# Altium PCB PCB1.PcbDoc (part 3 of 3)
Units mm, origin at the board's own origin, x right, y up, seen from the top; angles counter-clockwise.
Board outline 297.31 x 194.82 mm, 2 copper layers (Top Layer, Bottom Layer); 61 components, 34 nets, 159 pads, 65 vias.
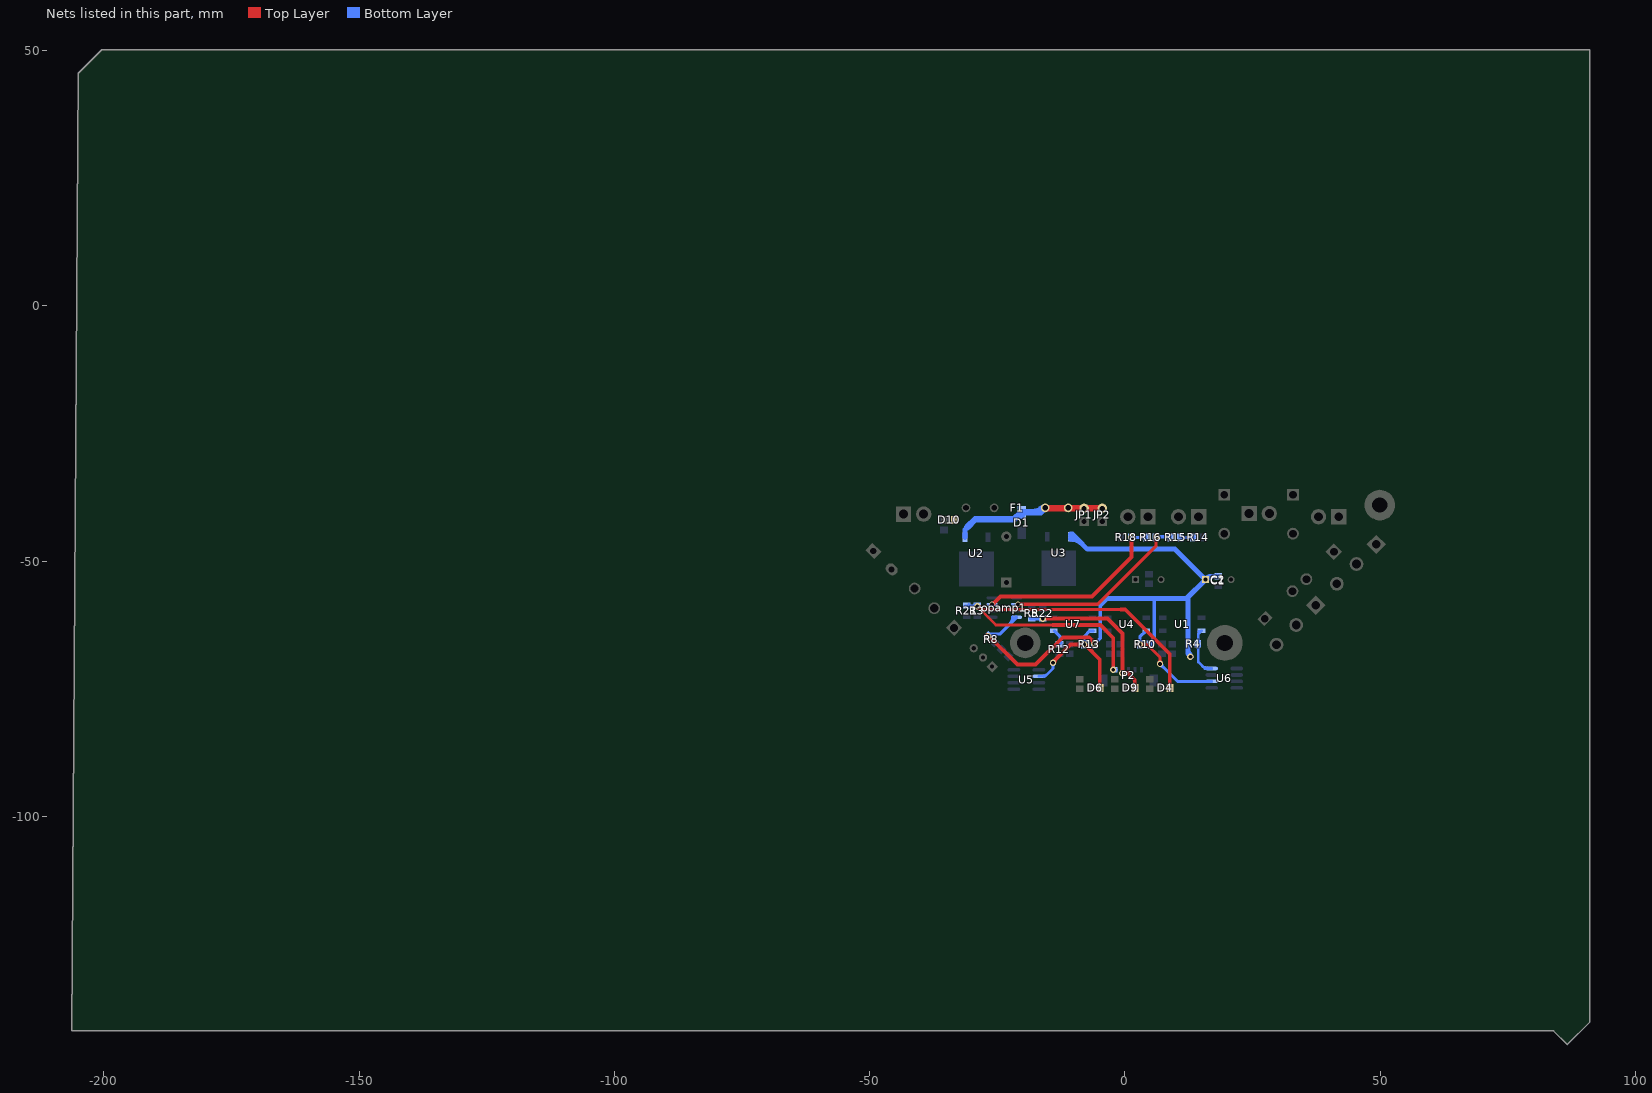
[diagram p3: the nets of this part, all layers, seen from the top]

## Via types
v1: diameter 1.27, hole 0.711, Top Layer to Bottom Layer, 63 vias
v2: diameter 1.016, hole 0.711, Top Layer to Bottom Layer, 2 vias

## Nets (pads, with @x,y where several pads share a name; then routed paths per layer and width w, separated by ;. In a path a pad name is that pad's centre, name@x,y a point inside that pad or via, vN(x,y) a via of type N, cw(c..) or ccw(c..) an arc to the next point about the centre after c; other vN are vias at no path point) (continued)
NetR12_1: R12.1 U7.1 | length 6.8
  Bottom Layer w0.635: U7.1@-13.843,-63.627 -12.7,-64.77 -12.7,-66.04 R12.1@-12.827,-66.167 ; R12.1@-12.962,-65.998 ccw(c-13.595,-65.365) -12.7,-65.365 ; R12.1@-12.962,-65.998 ccw(c-13.595,-65.365) -12.7,-65.365 ; R12.1@-12.962,-65.998 ccw(c-13.595,-65.365) -12.7,-65.365 ; -12.7,-65.495 ccw(c-11.989,-65.495) R12.1@-12.492,-65.998 ; -12.7,-65.495 ccw(c-11.989,-65.495) R12.1@-12.492,-65.998 ; -12.7,-65.495 ccw(c-11.989,-65.495) R12.1@-12.492,-65.998
NetR14_2: R14.2 R15.2 | length 10.2
  Bottom Layer w0.635: R15.2@10.856,-45.339 R14.2@13.401,-45.339 R14.2@13.462,-45.339 ; R15.2@11.091,-45.574 cw(c11.659,-46.142) 11.659,-45.339 ; R15.2@11.091,-45.574 cw(c11.659,-46.142) 11.659,-45.339 ; R15.2@11.091,-45.574 cw(c11.659,-46.142) 11.659,-45.339 ; R15.2@11.091,-45.104 ccw(c11.659,-44.536) 11.659,-45.339 ; R15.2@11.091,-45.104 ccw(c11.659,-44.536) 11.659,-45.339 ; R15.2@11.091,-45.104 ccw(c11.659,-44.536) 11.659,-45.339 ; 12.598,-45.339 cw(c12.598,-46.142) R14.2@13.166,-45.574 ; 12.598,-45.339 ccw(c12.598,-44.536) R14.2@13.166,-45.104 ; 12.598,-45.339 cw(c12.598,-46.142) R14.2@13.166,-45.574 ; 12.598,-45.339 ccw(c12.598,-44.536) R14.2@13.166,-45.104 ; 12.598,-45.339 cw(c12.598,-46.142) R14.2@13.166,-45.574 ; 12.598,-45.339 ccw(c12.598,-44.536) R14.2@13.166,-45.104
OPAMP-IN1: opamp1.3 R16.1 R18.2 | length 48
  Top Layer w0.75: v2(-26.035,-58.42) -26.035,-58.547 -24.384,-56.896 -6.477,-56.896 1.27,-49.149 v1(1.27,-45.339)
  Bottom Layer w0.635: R18.2@1.204,-45.339 v1(1.27,-45.339) R16.1@4.064,-45.339 ; R18.2@1.439,-45.574 cw(c2.007,-46.142) 2.007,-45.339 ; R18.2@1.439,-45.574 cw(c2.007,-46.142) 2.007,-45.339 ; R18.2@1.439,-45.574 cw(c2.007,-46.142) 2.007,-45.339 ; R18.2@1.439,-45.104 ccw(c2.007,-44.536) 2.007,-45.339 ; R18.2@1.439,-45.104 ccw(c2.007,-44.536) 2.007,-45.339 ; R18.2@1.439,-45.104 ccw(c2.007,-44.536) 2.007,-45.339 ; 2.037,-45.339 cw(c2.037,-44.572) 1.495,-45.114 ccw(c2.037,-44.572) 2.037,-45.339 ; 2.037,-45.339 ccw(c2.037,-46.106) 1.495,-45.564 cw(c2.037,-46.106) 2.037,-45.339 ; 3.327,-45.339 cw(c3.327,-46.142) R16.1@3.895,-45.574 ; 3.327,-45.339 ccw(c3.327,-44.536) R16.1@3.895,-45.104 ; 3.327,-45.339 cw(c3.327,-46.142) R16.1@3.895,-45.574 ; 3.327,-45.339 ccw(c3.327,-44.536) R16.1@3.895,-45.104 ; 3.327,-45.339 cw(c3.327,-46.142) R16.1@3.895,-45.574 ; 3.327,-45.339 ccw(c3.327,-44.536) R16.1@3.895,-45.104
OPAMP-IN2: opamp1.6 R15.1 R16.2 | length 49.2
  Top Layer w0.635: v2(-20.955,-58.42) -5.334,-58.42 6.096,-46.99 v1(6.096,-45.212) v1@6.096,-44.831 ; 6.096,-45.979 cw(c6.863,-45.979) 6.321,-45.437 ccw(c6.863,-45.979) 6.096,-45.979 ; 6.096,-45.979 ccw(c5.329,-45.979) 5.871,-45.437 cw(c5.329,-45.979) 6.096,-45.979
  Bottom Layer w0.635: R16.2@6.03,-45.339 6.157,-45.212 R15.1@8.89,-45.212 ; R16.2@6.265,-45.474 cw(c6.898,-46.107) 6.898,-45.212 ; R16.2@6.265,-45.474 cw(c6.898,-46.107) 6.898,-45.212 ; R16.2@6.265,-45.474 cw(c6.898,-46.107) 6.898,-45.212 ; R16.2@6.265,-45.004 ccw(c6.768,-44.501) 6.768,-45.212 ; R16.2@6.265,-45.004 ccw(c6.768,-44.501) 6.768,-45.212 ; R16.2@6.265,-45.004 ccw(c6.768,-44.501) 6.768,-45.212 ; 6.863,-45.212 cw(c6.863,-44.445) 6.321,-44.987 ccw(c6.863,-44.445) 6.863,-45.212 ; 6.863,-45.212 ccw(c6.863,-45.979) 6.321,-45.437 cw(c6.863,-45.979) 6.863,-45.212 ; 8.088,-45.212 cw(c8.088,-46.107) R15.1@8.721,-45.474 ; 8.088,-45.212 cw(c8.088,-46.107) R15.1@8.721,-45.474 ; 8.088,-45.212 cw(c8.088,-46.107) R15.1@8.721,-45.474 ; 8.218,-45.212 ccw(c8.218,-44.501) R15.1@8.721,-45.004 ; 8.218,-45.212 ccw(c8.218,-44.501) R15.1@8.721,-45.004 ; 8.218,-45.212 ccw(c8.218,-44.501) R15.1@8.721,-45.004
OPAMP-OUT1: D4.1 P2.1 R3.2 R21.1 | length 101.4
  Top Layer w0.508: v1(-28.956,-58.801) -25.276,-62.481 -15.624,-62.481 -15.621,-62.484 -14.097,-62.484 ; -28.321,-59.436 -0.762,-59.436 ; -28.306,-59.451 cw(c-27.655,-58.801) -28.575,-58.801 ccw(c-27.655,-58.801) -28.306,-59.451 ; -28.306,-59.451 ccw(c-28.956,-60.102) -28.956,-59.182 cw(c-28.956,-60.102) -28.306,-59.451
  Top Layer w0.75: -14.097,-62.484 -4.826,-62.484 -2.286,-65.024 v1(-2.286,-71.247) ; -0.762,-59.436 0.041,-59.436 8.763,-68.158 D4.1@8.763,-75.057 ; 8.763,-73.892 ccw(c9.635,-73.892) D4.1@9.018,-74.509
  Bottom Layer w0.508: R21.1@-31.242,-58.674 -31.176,-58.74 R3.2@-28.956,-58.74 ; R21.1@-30.608,-59.02 cw(c-29.932,-59.696) -29.932,-58.74 ; R21.1@-30.608,-59.02 cw(c-29.932,-59.696) -29.932,-58.74 ; R21.1@-30.608,-59.02 cw(c-29.932,-59.696) -29.932,-58.74 ; R21.1@-30.608,-58.46 ccw(c-29.932,-57.784) -29.932,-58.74 ; R21.1@-30.608,-58.46 ccw(c-29.932,-57.784) -29.932,-58.74 ; R21.1@-30.608,-58.46 ccw(c-29.932,-57.784) -29.932,-58.74 ; -30.012,-58.74 cw(c-30.012,-59.696) R3.2@-29.336,-59.02 ; -30.012,-58.74 ccw(c-30.012,-57.784) R3.2@-29.336,-58.46 ; -30.012,-58.74 cw(c-30.012,-59.696) R3.2@-29.336,-59.02 ; -30.012,-58.74 ccw(c-30.012,-57.784) R3.2@-29.336,-58.46 ; -30.012,-58.74 cw(c-30.012,-59.696) R3.2@-29.336,-59.02 ; -30.012,-58.74 ccw(c-30.012,-57.784) R3.2@-29.336,-58.46 ; -30.023,-58.74 cw(c-30.023,-59.868) -29.225,-59.07 ccw(c-30.023,-59.868) -30.023,-58.74 ; -29.729,-58.74 ccw(c-29.729,-58.028) -29.225,-58.532 cw(c-29.729,-58.028) -29.729,-58.74
  Bottom Layer w0.75: v1(-2.286,-71.247) P2.1@-1.778,-71.247
OPAMP-OUT2: D9.1 P2.2 R5.1 R22.1 | length 36
  Top Layer w0.75: v1(-16.129,-61.214) -3.429,-61.214 -0.508,-64.135 -0.508,-68.453 v1@-0.508,-71.374 ; v1(-0.508,-71.882) 0.508,-71.882 1.905,-73.279 D9.1@1.905,-74.93 ; 1.905,-73.892 ccw(c2.777,-73.892) D9.1@2.16,-74.509
  Bottom Layer w0.508: R5.1@-18.288,-61.087 R5.1@-18.227,-61.148
  Bottom Layer w0.75: R5.1@-18.415,-61.214 v1(-16.129,-61.214) ; R5.1@-17.994,-60.954 ccw(c-17.365,-60.325) -17.365,-61.214 ; R5.1@-17.994,-60.954 ccw(c-17.365,-60.325) -17.365,-61.214 ; R5.1@-17.994,-60.954 ccw(c-17.365,-60.325) -17.365,-61.214 ; -17.052,-61.214 ccw(c-17.052,-60.325) R22.1@-16.423,-60.954 ; -17.052,-61.214 ccw(c-17.052,-60.325) R22.1@-16.423,-60.954 ; -17.052,-61.214 ccw(c-17.052,-60.325) R22.1@-16.423,-60.954
"PULS OPTO 1": D6.1 R13.1 U5.2 U7.4 | length 38.8
  Top Layer w0.75: v1(-14.097,-69.85) -14.097,-69.723 -10.668,-66.294 v1(-8.001,-66.294) ; v1@-7.747,-66.294 -7.747,-66.421 -4.953,-69.215 D6.1@-4.953,-74.803 ; -4.953,-73.892 ccw(c-4.081,-73.892) D6.1@-4.698,-74.509 ; v1@-13.837,-69.85 cw(c-12.903,-69.85) -13.563,-69.189 ccw(c-12.903,-69.85) v1@-13.837,-69.85
  Bottom Layer w0.508: U5.2@-16.854,-72.517 -15.621,-72.517 -14.097,-70.993 -14.097,-69.977 v1@-14.224,-69.85 ; U5.2@-15.954,-72.421 ccw(c-15.954,-71.385) -15.222,-72.118 ; U5.2@-15.954,-72.421 ccw(c-15.954,-71.385) -15.222,-72.118 ; U5.2@-15.954,-72.421 ccw(c-15.954,-71.385) -15.222,-72.118 ; U5.2@-15.871,-72.565 cw(c-15.396,-72.839) -15.538,-72.31 ; U5.2@-15.871,-72.565 cw(c-15.396,-72.839) -15.538,-72.31 ; U5.2@-15.871,-72.565 cw(c-15.396,-72.839) -15.538,-72.31 ; -14.097,-70.77 cw(c-13.177,-70.77) -13.828,-70.119 ccw(c-13.177,-70.77) -14.097,-70.77 ; -14.097,-70.77 ccw(c-15.017,-70.77) -14.366,-70.119 cw(c-15.017,-70.77) -14.097,-70.77
  Bottom Layer w0.635: v1(-8.001,-66.294) -8.001,-64.77 -6.858,-63.627 U7.4@-6.223,-63.627 ; -8.001,-65.232 ccw(c-6.973,-65.232) R13.1@-7.7,-65.959 ; -8.001,-65.232 ccw(c-6.973,-65.232) R13.1@-7.7,-65.959 ; -8.001,-65.232 ccw(c-6.973,-65.232) R13.1@-7.7,-65.959 ; -8.001,-65.221 ccw(c-6.801,-65.221) -7.649,-66.069 cw(c-6.801,-65.221) -8.001,-65.221
"PULS OPTO 2": R10.1 U4.4 U6.2 | length 33.6
  Top Layer w0.635: v1(2.921,-66.294) 4.318,-66.294 6.858,-68.834 v1(6.858,-70.104) ; 3.688,-66.294 cw(c3.688,-65.527) 3.146,-66.069 ccw(c3.688,-65.527) 3.688,-66.294 ; 3.688,-66.294 ccw(c3.688,-67.061) 3.146,-66.519 cw(c3.688,-67.061) 3.688,-66.294 ; 6.858,-69.337 cw(c6.091,-69.337) 6.633,-69.879 ccw(c6.091,-69.337) 6.858,-69.337 ; 6.858,-69.337 ccw(c7.625,-69.337) 7.083,-69.879 cw(c7.625,-69.337) 6.858,-69.337
  Bottom Layer w0.508: 13.462,-73.533 U6.2@16.981,-73.533
  Bottom Layer w0.635: R10.1@2.54,-66.294 v1(2.921,-66.294) 2.921,-64.77 U4.4@4.127,-63.563 ; v1@6.731,-70.104 v1(6.858,-70.104) 10.287,-73.533 13.462,-73.533 ; 2.921,-65.527 cw(c2.154,-65.527) 2.696,-66.069 ccw(c2.154,-65.527) 2.921,-65.527 ; 2.921,-65.527 ccw(c3.688,-65.527) 3.146,-66.069 cw(c3.688,-65.527) 2.921,-65.527 ; 2.921,-65.232 ccw(c3.949,-65.232) R10.1@3.222,-65.959 ; 2.921,-65.232 ccw(c3.949,-65.232) R10.1@3.222,-65.959 ; 2.921,-65.232 ccw(c3.949,-65.232) R10.1@3.222,-65.959 ; 7.4,-70.646 cw(c7.942,-70.104) 7.175,-70.104 ccw(c7.942,-70.104) 7.4,-70.646 ; 7.4,-70.646 ccw(c6.858,-71.188) 6.858,-70.421 cw(c6.858,-71.188) 7.4,-70.646
"PULS OPTO 3": R4.1 U1.4 U6.4 | length 23.6
  Bottom Layer w0.508: U1.4@14.498,-63.683 cw(c13.938,-63.849) 14.351,-64.262 ; U1.4@14.986,-63.627 14.351,-64.262 ; U6.4@16.981,-70.993 15.621,-70.993 14.351,-69.723 14.351,-64.262 ; R4.1@14.005,-66.547 cw(c13.17,-67.382) 14.351,-67.382 ; R4.1@14.005,-66.547 cw(c13.17,-67.382) 14.351,-67.382 ; R4.1@14.005,-66.547 cw(c13.17,-67.382) 14.351,-67.382 ; R4.1@14.005,-65.787 ccw(c13.17,-64.952) 14.351,-64.952 ; R4.1@14.005,-65.787 ccw(c13.17,-64.952) 14.351,-64.952 ; R4.1@14.005,-65.787 ccw(c13.17,-64.952) 14.351,-64.952 ; 14.351,-67.064 cw(c15.082,-67.064) R4.1@14.565,-66.547 ; 14.351,-67.064 cw(c15.082,-67.064) R4.1@14.565,-66.547 ; 14.351,-67.064 cw(c15.082,-67.064) R4.1@14.565,-66.547 ; 14.351,-65.27 ccw(c15.082,-65.27) R4.1@14.565,-65.787 ; 14.351,-65.27 ccw(c15.082,-65.27) R4.1@14.565,-65.787 ; 14.351,-65.27 ccw(c15.082,-65.27) R4.1@14.565,-65.787 ; 15.132,-70.504 ccw(c16.081,-69.555) U6.4@16.081,-70.897 ; 15.132,-70.504 ccw(c16.081,-69.555) U6.4@16.081,-70.897 ; 15.132,-70.504 ccw(c16.081,-69.555) U6.4@16.081,-70.897 ; 15.665,-70.786 cw(c15.523,-71.315) U6.4@15.998,-71.041 ; 15.665,-70.786 cw(c15.523,-71.315) U6.4@15.998,-71.041 ; 15.665,-70.786 cw(c15.523,-71.315) U6.4@15.998,-71.041
VCC: C1.2 C2.1 opamp1.8 R4.2 R8.2 R10.2 R13.2 U3.3 | length 194.3
  Top Layer w0.75: v1@-26.924,-64.389 -21.082,-70.231 -17.526,-70.231 -12.192,-64.897 -6.985,-64.897 v1@-5.779,-66.103 ; -6.503,-65.379 cw(c-7.163,-66.04) v1@-6.229,-66.04 ; v1@-26.797,-64.903 cw(c-26.797,-65.837) -26.136,-65.177 ccw(c-26.797,-65.837) v1@-26.797,-64.903
  Bottom Layer w0.635: R8.2@-26.614,-64.384 ccw(c-26.177,-63.766) -25.799,-64.421 ; R8.2@-26.543,-64.262 -24.524,-64.262 opamp1.8@-21.222,-60.96 ; R8.2@-26.507,-64.323 ccw(c-26.101,-63.986) -25.837,-64.443 ; R13.2@-6.035,-66.294 -4.826,-65.085 -4.826,-58.547 ; R13.2@-5.969,-65.722 ccw(c-5.969,-64.502) -5.106,-65.365 ; R10.2@4.953,-66.04 ccw(c3,-64.087) 5.697,-64.682 ; R10.2@5.101,-66.408 ccw(c4.232,-65.539) 5.461,-65.539 ; R10.2@5.199,-66.284 ccw(c4.465,-65.298) 5.694,-65.298 ; R10.2@5.219,-66.194 cw(c6.235,-66.194) 5.517,-65.476 ; 5.715,-57.343 5.715,-65.278 5.461,-65.532 ; C2.1@15.748,-53.594 16.51,-52.832 C1.2@18.288,-52.832 ; R8.2@-26.626,-64.375 ccw(c-26.235,-63.762) -25.872,-64.392 ; R8.2@-26.626,-64.375 ccw(c-26.235,-63.762) -25.872,-64.392 ; R8.2@-26.626,-64.375 ccw(c-26.235,-63.762) -25.872,-64.392 ; R8.2@-26.626,-64.375 ccw(c-26.235,-63.762) -25.872,-64.392 ; R8.2@-26.626,-64.375 ccw(c-26.235,-63.762) -25.872,-64.392 ; R8.2@-26.528,-64.771 cw(c-25.3,-65.999) -25.3,-64.262 ; R8.2@-26.528,-64.771 cw(c-25.3,-65.999) -25.3,-64.262 ; R8.2@-26.528,-64.771 cw(c-25.3,-65.999) -25.3,-64.262 ; R8.2@-26.514,-64.315 ccw(c-26.152,-63.995) -25.91,-64.414 ; R8.2@-26.514,-64.315 ccw(c-26.152,-63.995) -25.91,-64.414 ; R8.2@-26.514,-64.315 ccw(c-26.152,-63.995) -25.91,-64.414 ; -22.558,-62.296 ccw(c-23.894,-60.96) opamp1.8@-22.005,-60.96 ; -22.558,-62.296 ccw(c-23.894,-60.96) opamp1.8@-22.005,-60.96 ; -22.558,-62.296 ccw(c-23.894,-60.96) opamp1.8@-22.005,-60.96 ; opamp1.8@-21.474,-61.212 ccw(c-21.726,-60.96) opamp1.8@-21.37,-60.96 ; opamp1.8@-21.474,-61.212 ccw(c-21.726,-60.96) opamp1.8@-21.37,-60.96 ; opamp1.8@-21.474,-61.212 ccw(c-21.726,-60.96) opamp1.8@-21.37,-60.96 ; R13.2@-6.035,-65.862 ccw(c-6.035,-64.817) -5.297,-65.556 ; R13.2@-6.035,-65.862 ccw(c-6.035,-64.817) -5.297,-65.556 ; R13.2@-6.035,-65.862 ccw(c-6.035,-64.817) -5.297,-65.556 ; R10.2@4.887,-65.862 ccw(c4.887,-65.271) R10.2@5.304,-65.689 ; R10.2@4.887,-65.862 ccw(c4.887,-65.271) R10.2@5.304,-65.689 ; R10.2@4.887,-65.862 ccw(c4.887,-65.271) R10.2@5.304,-65.689 ; R10.2@4.887,-65.862 ccw(c4.887,-65.271) R10.2@5.304,-65.689 ; R10.2@5.219,-66.173 cw(c6.05,-66.121) 5.461,-65.532 ; R10.2@5.219,-66.173 cw(c6.05,-66.121) 5.461,-65.532 ; R10.2@5.219,-66.173 cw(c6.05,-66.121) 5.461,-65.532 ; C2.1@15.581,-53.409 cw(c16.87,-54.56) 16.87,-52.832 ; C2.1@15.581,-53.409 cw(c16.87,-54.56) 16.87,-52.832 ; C2.1@15.581,-53.409 cw(c16.87,-54.56) 16.87,-52.832 ; C2.1@15.788,-53.236 ccw(c15.788,-52.47) C2.1@16.33,-53.012 ; C2.1@15.788,-53.236 ccw(c15.788,-52.47) C2.1@16.33,-53.012 ; C2.1@15.788,-53.236 ccw(c15.788,-52.47) C2.1@16.33,-53.012 ; C2.1@15.894,-53.252 ccw(c16.36,-51.746) 17.225,-53.065 ; C2.1@15.894,-53.252 ccw(c16.36,-51.746) 17.225,-53.065 ; C2.1@15.894,-53.252 ccw(c16.36,-51.746) 17.225,-53.065 ; C2.1@16.055,-53.832 cw(c18.288,-55.825) C1.2@18.288,-52.832 ; C2.1@16.055,-53.832 cw(c18.288,-55.825) C1.2@18.288,-52.832 ; C2.1@16.055,-53.832 cw(c18.288,-55.825) C1.2@18.288,-52.832 ; C2.1@16.145,-53.594 cw(c17.105,-53.594) 16.427,-52.915 ; C2.1@16.145,-53.594 cw(c17.105,-53.594) 16.427,-52.915 ; C2.1@16.145,-53.594 cw(c17.105,-53.594) 16.427,-52.915 ; 17.226,-52.832 cw(c17.226,-53.86) C1.2@17.953,-53.133 ; 17.226,-52.832 cw(c17.226,-53.86) C1.2@17.953,-53.133 ; 17.226,-52.832 cw(c17.226,-53.86) C1.2@17.953,-53.133 ; 17.314,-53.093 cw(c17.556,-53.993) C1.2@18.022,-53.186 ; 17.314,-53.093 cw(c17.556,-53.993) C1.2@18.022,-53.186 ; 17.314,-53.093 cw(c17.556,-53.993) C1.2@18.022,-53.186 ; 17.314,-53.093 cw(c17.556,-53.993) C1.2@18.022,-53.186 ; 17.314,-53.093 cw(c17.556,-53.993) C1.2@18.022,-53.186 ; 17.314,-53.093 cw(c17.556,-53.993) C1.2@18.022,-53.186 ; 17.491,-53.045 ccw(c17.317,-52.395) C1.2@17.9,-52.732 ; 17.491,-53.045 ccw(c17.317,-52.395) C1.2@17.9,-52.732 ; 17.491,-53.045 ccw(c17.317,-52.395) C1.2@17.9,-52.732 ; 17.491,-53.045 ccw(c17.317,-52.395) C1.2@17.9,-52.732 ; 17.491,-53.045 ccw(c17.317,-52.395) C1.2@17.9,-52.732 ; 17.491,-53.045 ccw(c17.317,-52.395) C1.2@17.9,-52.732 ; R8.2@-26.572,-64.868 cw(c-25.111,-66.329) -25.111,-64.262 ccw(c-25.111,-66.329) R8.2@-26.572,-64.868
  Bottom Layer w1: U3.3@-10.674,-45.18 -9.811,-45.18 -7.366,-47.625 9.779,-47.625 15.748,-53.594 12.065,-57.277 ; -4.826,-58.547 -3.556,-57.277 12.319,-57.277 12.319,-68.072 v1@12.954,-68.707 ; 12.62,-68.087 cw(c11.952,-68.472) v1@12.697,-68.672 ; U3.3@-10.674,-45.63 cw(c-10.674,-48.8) -8.433,-46.558 ; U3.3@-10.674,-45.63 cw(c-10.674,-48.8) -8.433,-46.558 ; U3.3@-10.674,-45.63 cw(c-10.674,-48.8) -8.433,-46.558 ; U3.3@-10.674,-44.63 cw(c-10.674,-45.386) -10.14,-44.851 ; U3.3@-10.674,-44.63 cw(c-10.674,-45.386) -10.14,-44.851 ; U3.3@-10.674,-44.63 cw(c-10.674,-45.386) -10.14,-44.851 ; 12.319,-67.155 ccw(c14.379,-67.155) 12.922,-68.612 cw(c14.379,-67.155) 12.319,-67.155
  other v1: 12.827,-68.707 -5.969,-66.167 -26.797,-64.643
VSS: D1.2 D10.1 F1.2 F1.3 JP1.2 JP2.2 U2.1 | length 48.2
  Top Layer w1.27: F1.2@-15.494,-39.624 JP1.2@-8.001,-39.624 JP2.2@-4.445,-39.624
  Bottom Layer w1: U2.1@-31.363,-45.307 -31.363,-43.809 -30.861,-43.307
  Bottom Layer w1.27: -30.861,-43.307 -29.337,-41.783 -21.717,-41.783 -20.32,-40.386 -16.476,-40.386 F1.2@-15.639,-39.549 ; -21.514,-41.58 cw(c-20.193,-42.902) D1.2@-20.193,-41.033 ; -21.514,-41.58 cw(c-20.193,-42.902) D1.2@-20.193,-41.033 ; -21.514,-41.58 cw(c-20.193,-42.902) D1.2@-20.193,-41.033 ; -21.125,-41.283 ccw(c-21.443,-40.096) D1.2@-20.379,-40.711 ; -21.125,-41.283 ccw(c-21.443,-40.096) D1.2@-20.379,-40.711 ; -21.125,-41.283 ccw(c-21.443,-40.096) D1.2@-20.379,-40.711 ; -18.179,-40.386 ccw(c-18.179,-37.009) F1.2@-15.791,-39.397 ; -18.179,-40.386 ccw(c-18.179,-37.009) F1.2@-15.791,-39.397 ; -18.179,-40.386 ccw(c-18.179,-37.009) F1.2@-15.791,-39.397 ; -16.627,-39.879 cw(c-16.013,-40.943) F1.2@-15.695,-39.757 ; -16.627,-39.879 cw(c-16.013,-40.943) F1.2@-15.695,-39.757 ; -16.627,-39.879 cw(c-16.013,-40.943) F1.2@-15.695,-39.757
pads on no net: P2.0 S1.0 S2.0 U5.1 U5.4 U5.5 U5.8 U6.1 U6.8 VR1.3

## Polygon pours and split planes (outlines as drawn)
GND on Top Layer "Bottom Layer-No Net" (solid, pour order 8): 53.34,-35.56 53.34,-46.99 23.876,-76.454 -24.384,-76.454 -25.273,-75.565 -25.273,-75.438 -53.34,-47.371 -53.34,-35.56 53.34,-35.56
GND on Bottom Layer "Bottom Layer-No Net" (solid, pour order 10): -53.34,-35.56 -53.34,-47.117 -24.13,-76.327 23.876,-76.327 53.34,-46.863 53.34,-35.814 53.213,-35.687 -53.213,-35.687 -53.34,-35.56

## Keep-outs
Keep-Out Layer:
  lines w0.254: -49.185,-27.105 -45.72,-30.571 -42.255,-34.036 ; 42.255,-34.036 45.72,-30.571 49.185,-27.105 ; -53.594,-47.601 -24.487,-76.708 23.979,-76.708 53.594,-47.093 53.594,-35.306 -53.594,-35.306 -53.594,-47.601

## Other copper
Top Layer:
  rectangle net +12: 18.669,-76.2 20.32,-72.136
  text "KN2C" at -48.26,-44.196 h2.2 r90
  text "Designed by:" at -51.562,-45.339 h1 r90
  text "1" at -5.715,-51.562 h1.2
Bottom Layer:
  rectangle net +12: 18.669,-76.2 20.193,-72.136
  pour cut-out: -53.34,-35.56 -53.34,-47.371 -50.038,-50.546 -47.498,-48.133 -45.847,-46.355 -45.847,-38.316 -19.939,-37.973 16.637,-38.481 16.51,-47.371 34.544,-65.405 34.671,-65.405 53.213,-46.863 53.213,-35.687

## Silkscreen, mask and mechanical layers (free items; w line width, h text height)
Bottom Solder:
  lines w2: -49.294,-47.988 -49.294,-41.184 -45.067,-36.957 14.501,-36.957 19.431,-36.957 ; 4.52,-41.275 4.52,-37.54 ; 14.426,-41.275 14.426,-37.032 ; 19.431,-44.704 23.495,-40.64 ; 19.558,-36.83 28.194,-36.83 32.766,-36.83 ; 24.309,-40.64 24.309,-53.138 33.528,-62.357 ; 28.269,-40.64 28.269,-36.905 ; 32.893,-44.577 37.211,-44.577 40.767,-48.133 ; 32.893,-36.957 35.297,-36.957 cw(c35.297,-39.125) 36.83,-37.592 ; 37.102,-37.864 cw(c35.306,-39.66) 37.846,-39.66 ; 40.894,-48.133 43.307,-50.546 45.212,-50.546 ; 41.858,-41.275 45.339,-44.756 45.339,-50.546